# Allegro board B07_0925.brd
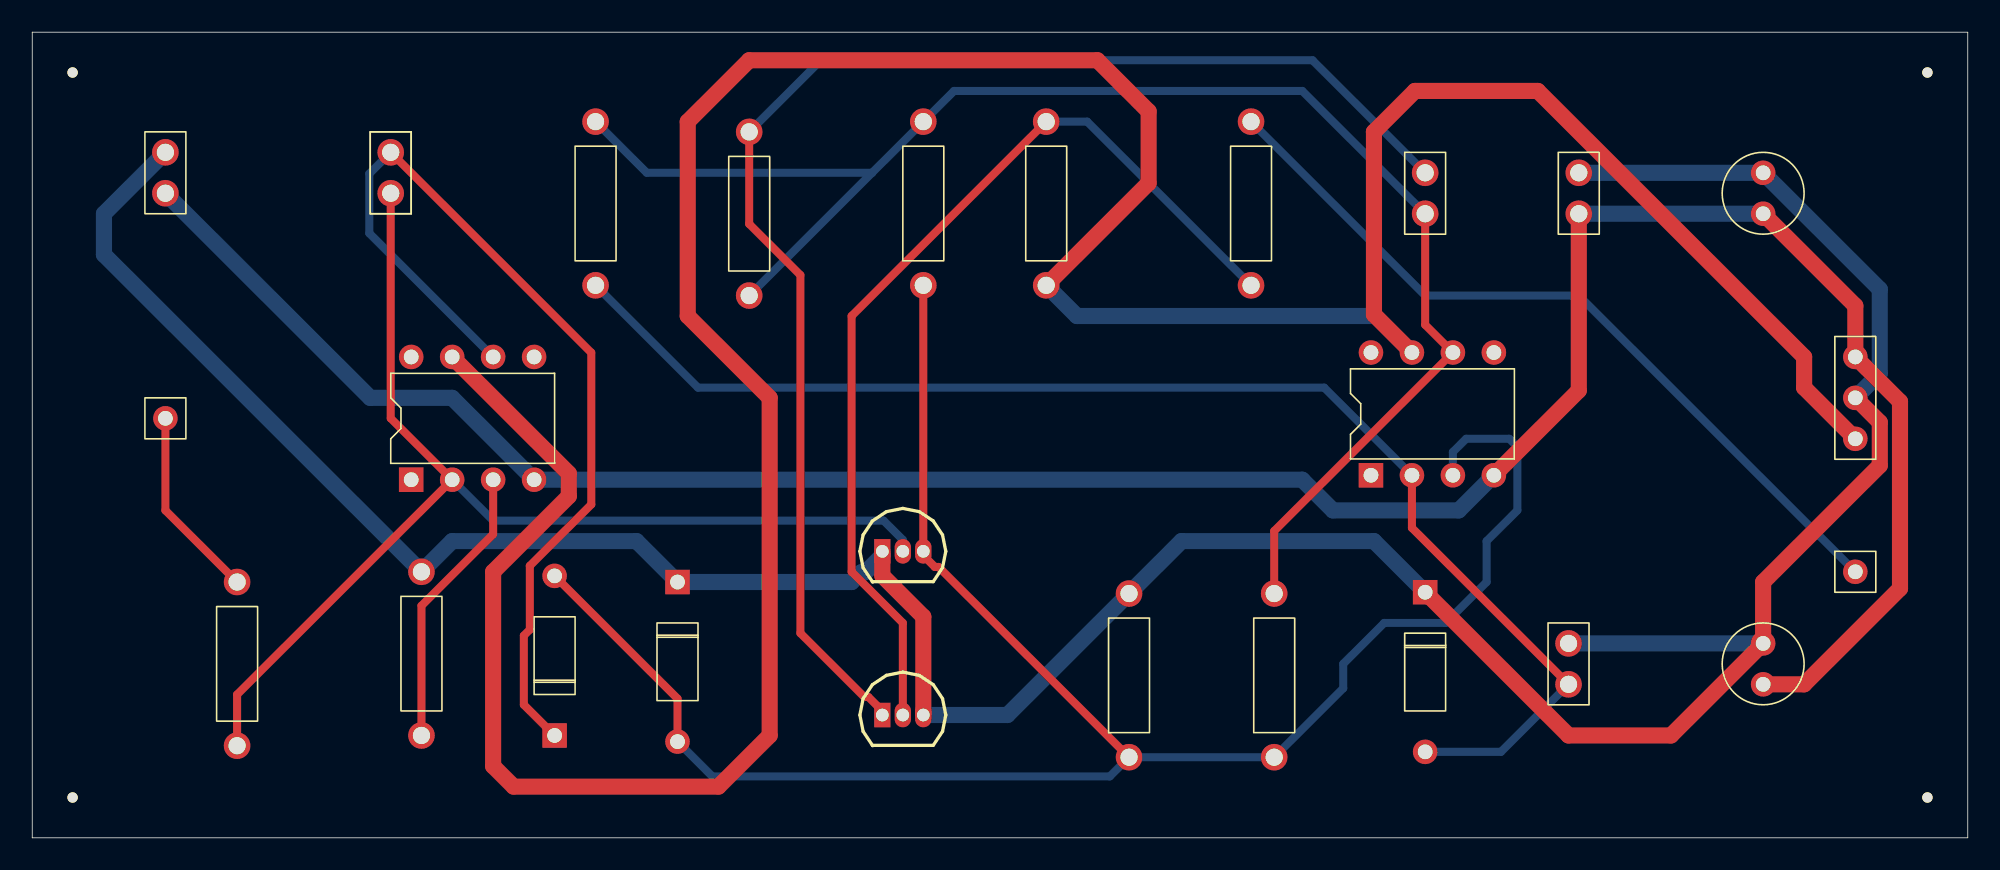
[diagram p0: board, top side]
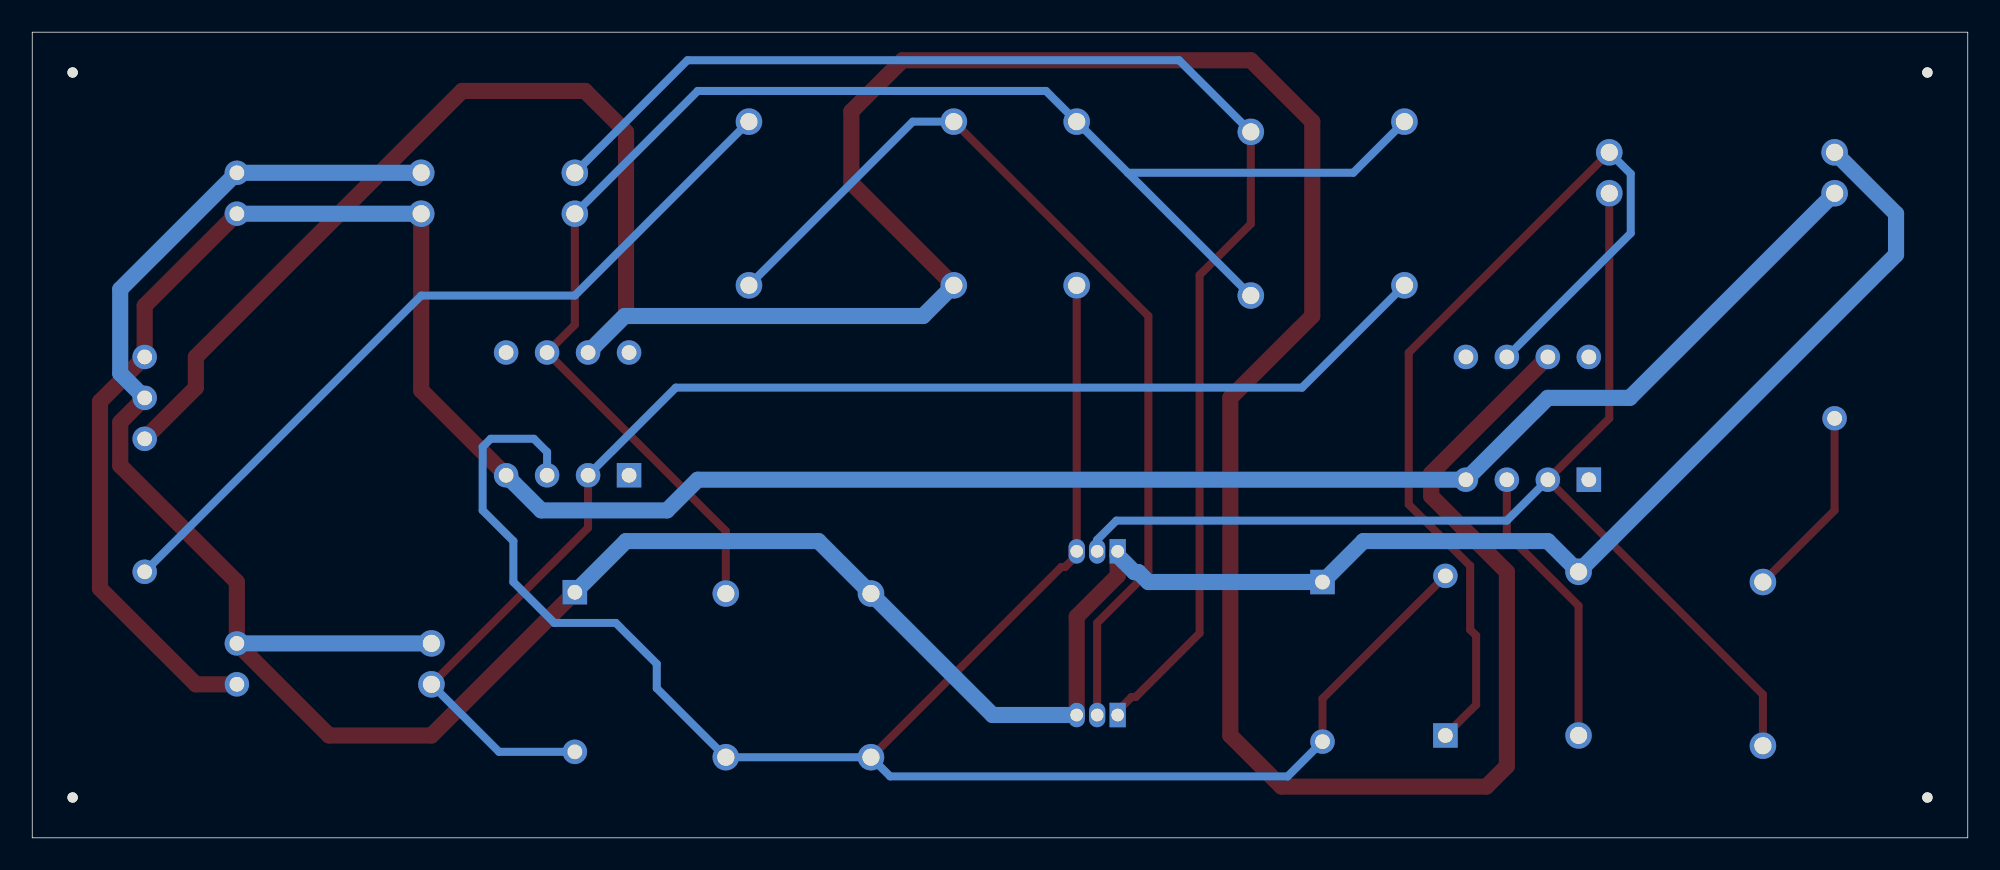
[diagram p1: board, bottom side, seen from below]

Outline 120 x 50 mm; copper layers: TOP, BOTTOM. Coordinates in mm from the lower left corner of the outline.
Outline path: 0,50 0,0 120,0 120,50 0,50

## Design rules (mm)
constraint set DEFAULT: min track width 0.5
nets with their own width: min track width 1; nets +12V -12V GND

## Placement (name value [footprint] x y rotation side)
C1  CAP NP  [CAPCK05]  8.26 40.01 0 top
C2  CAP NP  [CAPCK05]  22.23 40.01 0 top
C3  CAP NP  [CAPCK05]  95.89 38.73 0 top
C4  CAP NP  [CAPCK05]  95.25 9.53 0 top
C5  CAP NP  [CAPCK05]  86.36 38.73 0 top
C6  CAP POL  [CAP196]  107.31 12.06 180 top
C7  CAP POL  [CAP196]  107.31 38.73 0 top
D1  DIODE  [DO41]  86.36 15.24 180 top
D2  DIODE  [DO41]  32.38 6.35 0 top
D3  DIODE  [DO41]  40.01 15.88 180 top
J1  V1  [JUMPER1]  8.26 26.04 0 top
J2  CON3  [JUMPER3]  113.03 24.77 90 top
J3  CON1  [JUMPER1]  113.03 16.51 0 top
NOREF  -  [unnamed]  2.5 47.5 0 top
NOREF#2  -  [unnamed]  117.5 2.5 0 top
NOREF#3  -  [unnamed]  117.5 47.5 0 top
NOREF#4  -  [#2]  9.24 0 90 top
NOREF#5  -  [unnamed]  2.5 2.5 0 top
NOREF#6  -  [#2]  0 38.52 0 top
Q1  NPN BCE  [TO92]  52.7 17.78 0 top
Q2  NPN BCE  [TO92]  52.7 7.62 0 top
R1  RESISTOR  [RES400]  12.7 5.71 0 top
R2  RESISTOR  [RES400]  24.13 6.35 0 top
R3  RESISTOR  [RES400]  68 5 0 top
R4  RESISTOR  [RES400]  77 5 0 top
R5  RESISTOR  [RES400]  55.24 34.29 0 top
R6  RESISTOR  [RES400]  62.87 34.29 0 top
R7  RESISTOR  [RES400]  75.56 34.29 0 top
R8  RESISTOR  [RES400]  44.45 33.66 0 top
R9  RESISTOR  [RES400]  34.92 34.29 0 top
U1  LM741  [DIP8_3]  23.5 22.23 90 top
U2  LM741  [DIP8_3]  83 22.5 90 top

## Library data of the parts
C1-C5 = CAP NP: Tolerance: ***; User Part Number: ***
C6 C7 = CAP POL: Tolerance: ***; User Part Number: ***
D1-D3 = DIODE
J1 J3 = CON1: User Part Number: ***
J2 = CON3: User Part Number: ***
Q1 Q2 = NPN BCE
R1-R9 = R: Tolerance: ***; User Part Number: ***
U1 U2 = LM741_0: Tolerance: ***; User Part Number: ***

## Footprints (pads in the part's own frame, mm; a bottom-side part is the same pattern mirrored in y, then rotated)
CAP196
  round 1.524 hole 0.914: 1(0,0) 2(0,2.54)
CAPCK05
  round 1.651 hole 1.067: 1(0,0) 2(0,2.54)
DIP8_3
  rect 1.524x1.524 hole 0.914: 1(0,0)
  round 1.524 hole 0.914: 2(0,-2.54) 3(0,-5.08) 4(0,-7.62) 5(7.62,-7.62) 6(7.62,-5.08) 7(7.62,-2.54) 8(7.62,0)
DO41
  rect 1.524x1.524 hole 0.914: 1(0,0)
  round 1.524 hole 0.914: 2(0,9.906)
JUMPER1
  round 1.524 hole 0.914: 1(0,0)
JUMPER3
  round 1.524 hole 0.914: 1(0,0) 2(2.54,0) 3(5.08,0)
RES400
  round 1.651 hole 1.067: 1(0,0) 2(0,10.16)
TO92
  rect 1.016x1.524 hole 0.787: 1(0,0)
  oval 1.016x1.524 hole 0.787: 2(1.27,0) 3(2.54,0)
unnamed
  round 0.635 hole 3.175 unplated: (0,0)

## Nets
+12V: J2.1 R6.1 U1.7 U2.7
-12V: C1.1 C3.1 C6.2 C7.1 J2.3 U1.4(V-) U2.4(V-)
GND: C1.2 C3.2 C4.2 C6.1 C7.2 D1.1(K) D3.1(K) J2.2 Q1.1 Q2.3(E) R2.2 R3.2
N03271: Q2.2 R6.2 R7.1
N03275: C4.1 D1.2 R9.1 U2.2
N03291: C5.1 R4.2 R5.2 R8.1 R9.2 U2.6
N03373: J3.1 R7.2
N03409: C2.1 Q1.2 R1.1 U1.2
N03417: C2.2 D2.1(K) U1.6
N03437: C5.2 Q2.1 R8.2
N03581: J1.1 R1.2
N03645: D2.2 D3.2 Q1.3(E) R3.1 R4.1 R5.1 U2.3
N03657: R2.1 U1.3

Pads without a net: U1 1 5 8; U2 1 5 8

## Routing (per net, layer and track width the routed paths; a pad name or vN(x,y) marks a point on that pad's centre or on a via; arc(x,y) is an arc through that point)
+12V: length 214.5
  TOP w1: 26.04,29.84 33.27,22.61 33.27,21.2 28.57,16.51 28.57,4.45 29.84,3.17 42.55,3.17 45.72,6.35 45.72,27.3 40.64,32.38 40.64,44.45 44.45,48.26 66.04,48.26 69.22,45.09 69.22,40.64 R6.1 ; U2.7 83.19,32.48 83.19,43.81 85.72,46.35 93.34,46.35 109.86,29.84 109.86,27.94 J2.1
  BOTTOM w1: R6.1 64.77,32.38 83.28,32.38 U2.7
-12V: length 159.1
  TOP w1: U2.4 95.89,27.77 C3.1 ; C7.1 113.03,33.02 J2.3 115.8,27.07 115.8,15.47 109.86,9.53 C6.2
  BOTTOM w1: C3.1 C7.1 ; 90.62,22.41 U2.4 88.44,20.32 80.64,20.32 78.74,22.23 U1.4 26.04,27.3 20.95,27.3 C1.1
GND: length 202.2
  TOP w1: Q1.1 52.7,16.26 55.24,13.72 Q2.3 ; J2.2 114.55,25.79 114.55,23.11 107.31,15.88 C6.1 101.6,6.35 95.25,6.35 D1.1
  BOTTOM w1: D1.1 83.19,18.41 71.25,18.41 R3.2 60.46,7.62 Q2.3 ; J2.2 114.55,28.82 114.55,34.04 C7.2 C3.2 ; 95.25,12.06 C6.1 ; C1.2 4.45,38.73 4.45,36.2 R2.2 26.04,18.41 37.47,18.41 D3.1 50.8,15.88 51.41,16.48 51.66,16.48 52.7,17.53 Q1.1
N03271: length 60.1
  TOP w0.5: R6.2 50.8,32.38 50.8,16.51 53.98,13.34 Q2.2
  BOTTOM w0.5: R7.1 65.41,44.45 R6.2
N03275: length 83.1
  TOP w0.5: C4.1 85.54,19.23 U2.2
  BOTTOM w0.5: D1.2 91.06,5.33 C4.1 ; R9.1 41.27,27.94 80.1,27.94 U2.2
N03291: length 97.7
  TOP w0.5: R4.2 77,19.04 U2.6 86.36,31.84 C5.1
  BOTTOM w0.5: C5.1 78.74,46.35 57.15,46.35 R5.2 52.07,41.27 ; R9.2 38.1,41.27 52.07,41.27 ; R8.1 52.07,41.27
N03373: length 49
  BOTTOM w0.5: R7.2 86.36,33.66 95.89,33.66 J3.1
N03409: length 71.6
  TOP w0.5: R1.1 12.7,8.89 U1.2 22.23,26.04 C2.1
  BOTTOM w0.5: Q1.2 53.98,18.49 52.78,19.68 28.57,19.68 U1.2
N03417: length 60.3
  TOP w0.5: C2.2 34.66,30.11 34.66,20.69 30.85,16.88 30.85,12.92 30.48,12.55 30.48,8.26 D2.1
  BOTTOM w0.5: 28.57,29.84 20.9,37.52 20.9,41.22 C2.2
N03437: length 86.4
  TOP w0.5: R8.2 44.45,38.1 47.62,34.92 47.62,12.7 51.59,8.74 51.84,8.74 52.7,7.87 Q2.1
  BOTTOM w0.5: R8.2 48.9,48.26 79.38,48.26 C5.2
N03581: length 12
  TOP w0.5: R1.2 8.26,20.32 J1.1
N03645: length 120.3
  TOP w0.5: R3.1 56.19,16.81 55.96,16.81 55.24,17.53 Q1.3 R5.1 ; D3.2 40.01,8.64 D2.2
  BOTTOM w0.5: U2.3 88.08,23.95 88.9,24.77 91.58,24.77 92.08,24.27 92.08,20.32 90.17,18.41 90.17,15.88 87.63,13.34 83.82,13.34 81.28,10.79 81.28,9.28 R4.1 R3.1 66.81,3.81 42.16,3.81 D3.2
N03657: length 17.7
  TOP w0.5: R2.1 24.13,14.4 28.57,18.85 U1.3

## Text on the board
COMPVAL_TYPE_TOP: FIGURE | FINISHED_SIZE | 0.7874 | 0.9144 | 1.0668 | 3.175 | DRILL CHART: TOP to BOTTOM | ALL UNITS ARE IN MILLIMETERS | PLATED | NON-PLATED | QTY | 6 | 31 | 28 | 4
